# Altium PCB AudioPCB.PcbDoc (part 2 of 2)
Units mm, origin at the board's own origin, x right, y up, seen from the top; angles counter-clockwise.
Board outline 80 x 60 mm, 4 copper layers (Top Layer, GND, Power, Bottom Layer), stack 1.586 mm thick; 193 components, 130 nets, 539 pads, 148 vias.
Unrouted connection lines stored in the file: 1.
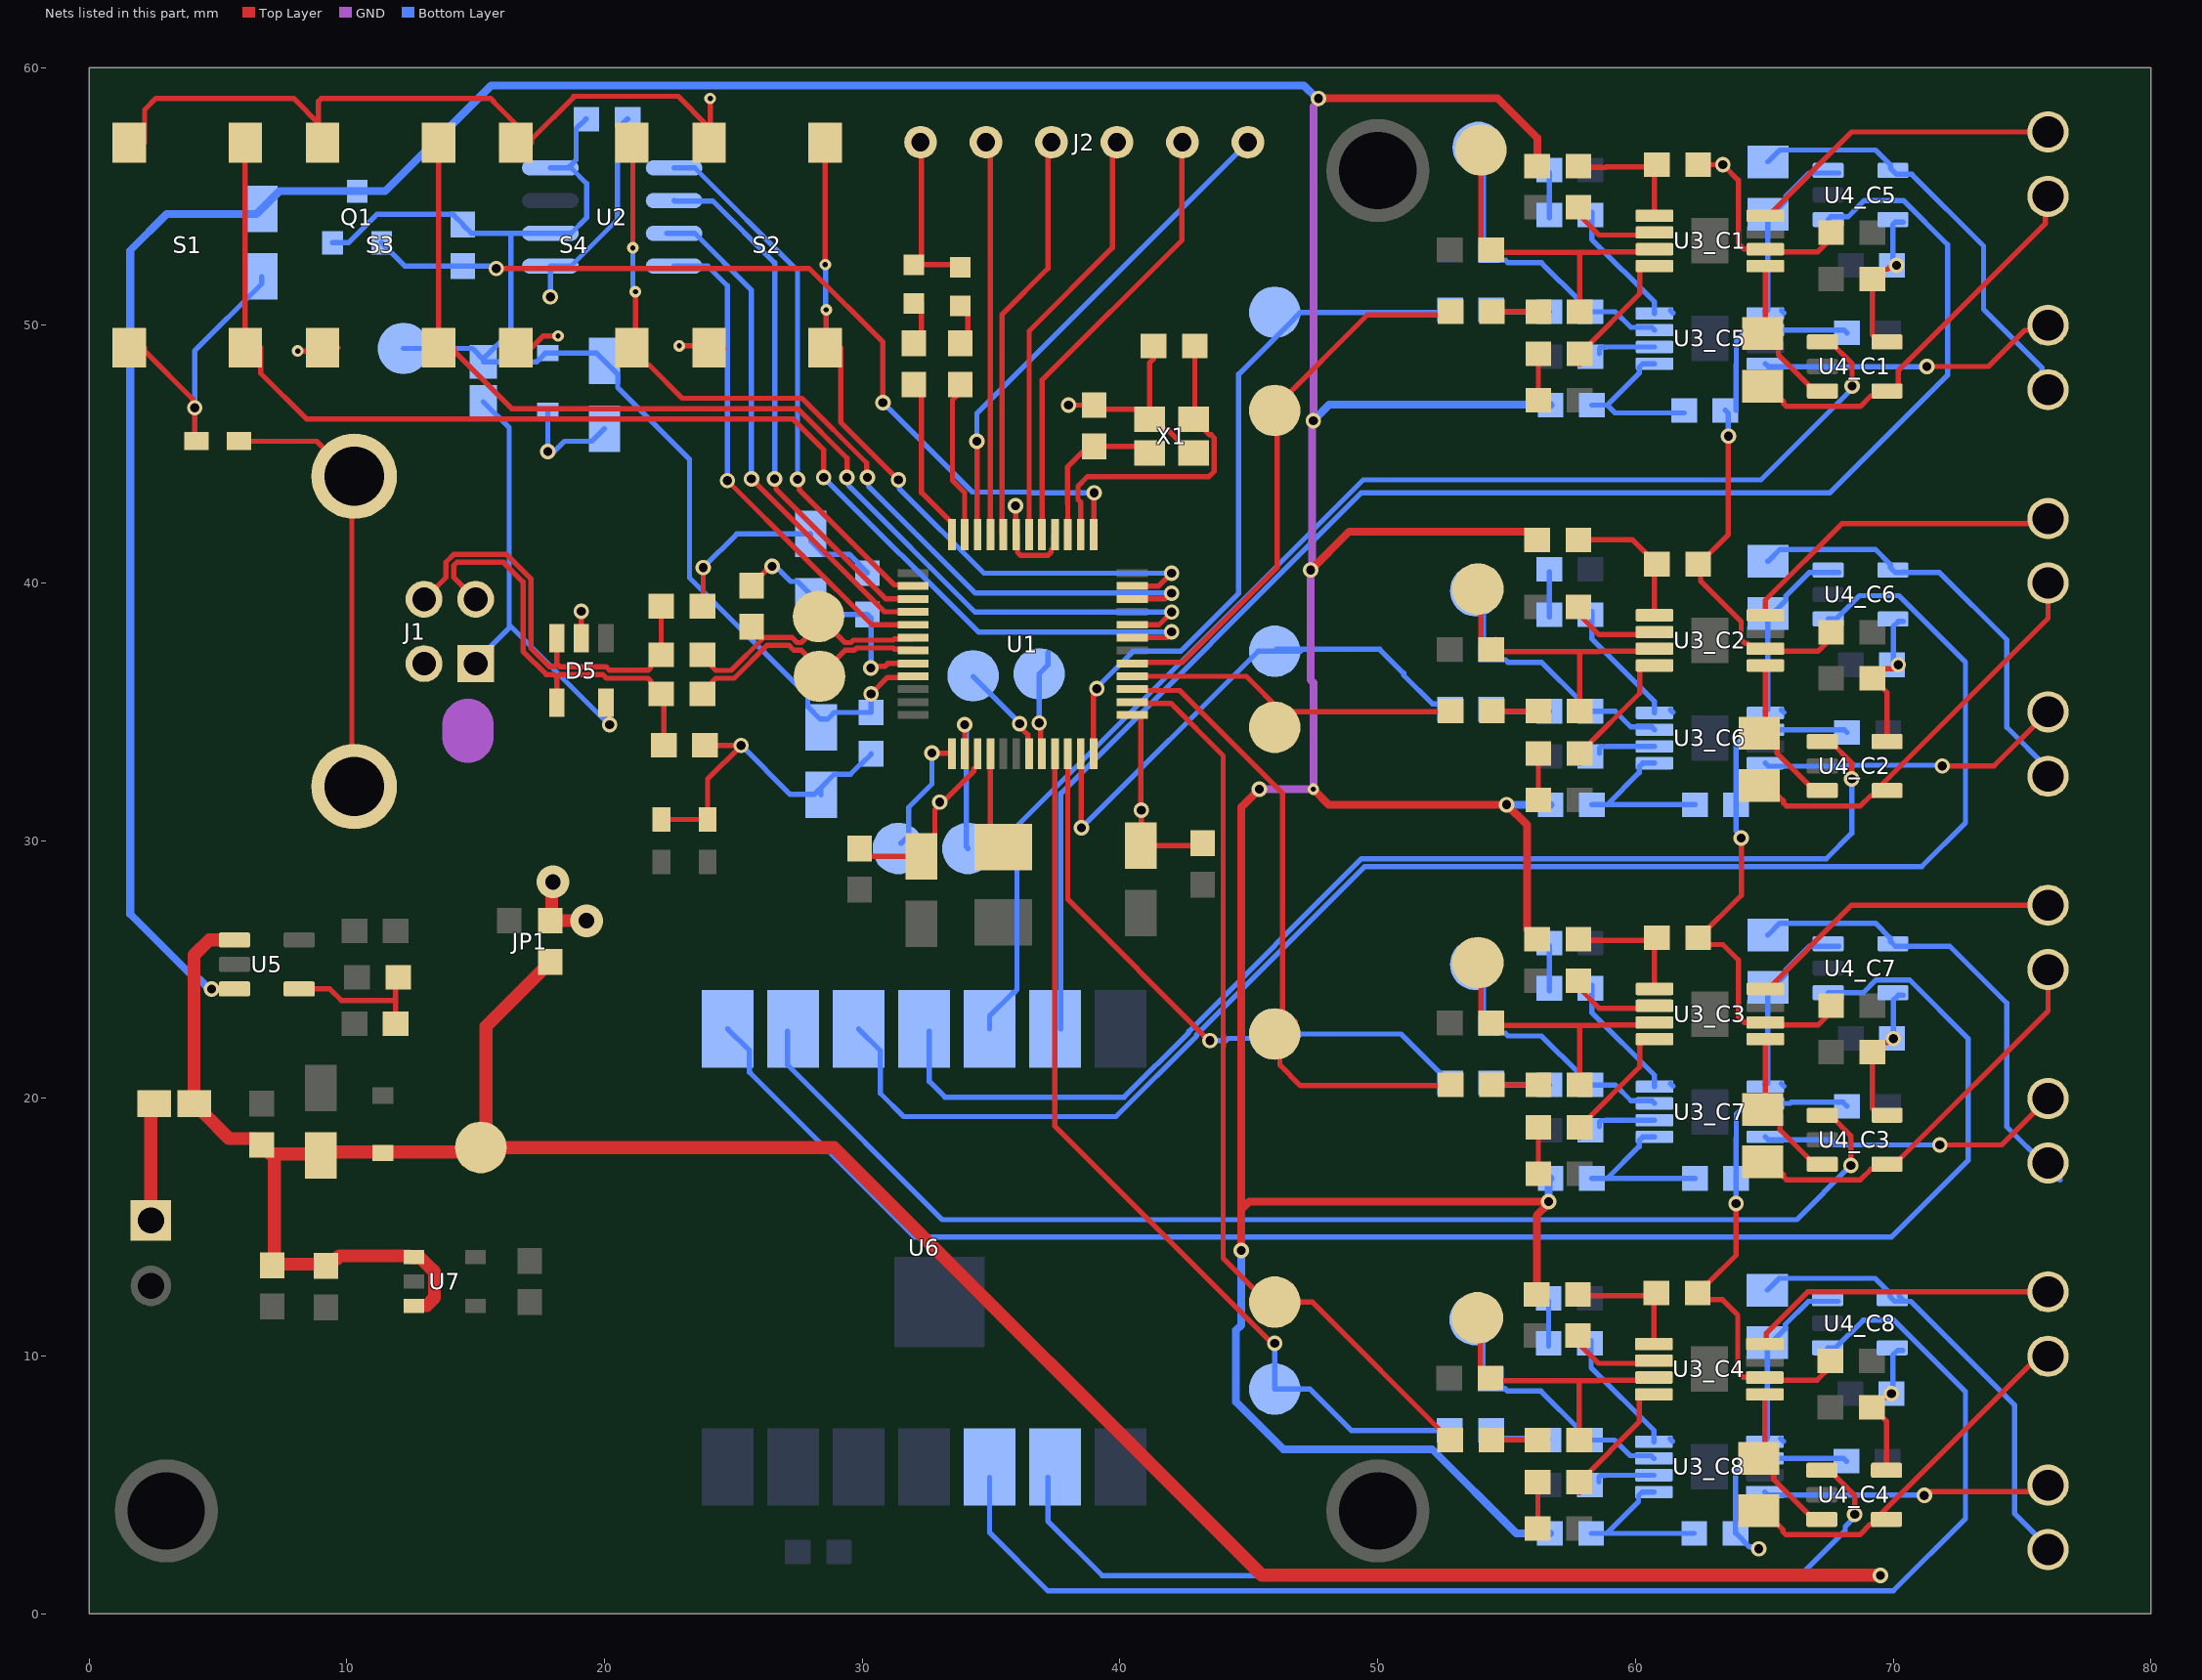
[diagram p4: the nets of this part, all layers, seen from the top]

## Via types
v1: diameter 0.6, hole 0.35, Top Layer to Bottom Layer, 97 vias
v2: diameter 0.55, hole 0.3, Top Layer to Bottom Layer, 40 vias
v3: diameter 0.45, hole 0.2, Top Layer to Bottom Layer, 9 vias
v4: diameter 1.27/1.27/1.27/1.27 (per signal layer), hole 0.6, Top Layer to Bottom Layer, 2 vias

## Nets (pads, with @x,y where several pads share a name; then routed paths per layer and width w, separated by ;. In a path a pad name is that pad's centre, name@x,y a point inside that pad or via, vN(x,y) a via of type N, cw(c..) or ccw(c..) an arc to the next point about the centre after c; other vN are vias at no path point) (continued)
AMP: C15.2 C16.2 C17.2 C18.2 C21_C1.2 C21_C2.2 C21_C3.2 C21_C4.2 C21_C5.2 C21_C6.2 C21_C7.2 C21_C8.2 JP1.2 R9_C1.2 R9_C2.2 R9_C3.2 R9_C4.2 R9_C5.2 R9_C6.2 R9_C7.2 R9_C8.2 U1.27 U1.37 U3_C1.6 U3_C2.6 U3_C3.6 U3_C4.6 U3_C5.6 U3_C6.6 U3_C7.6 U3_C8.6 | length 98
  Top Layer w0.203: C17.2@29.9,29.7 30.2,29.4 C18.2@32.3,29.4 32.515,29.4 32.813,29.698 32.813,31.206 33,31.393 v1(33,31.5) 33.076,31.576 33.206,31.576 34.326,32.696 34.326,32.783 34.473,32.93 U1.27@34.473,33.38 ; U1.37@40.473,34.88 40.752,34.88 40.8,34.832 v1@40.8,31.21 ; v1(40.822,31.188) 40.822,30.8 ; C15.2@41.029,30.039 C15.2@40.822,30.247 ; C15.2@41.033,30.036 40.822,30.036 C15.2@40.822,30.247 ; C15.2@41.033,30.043 C15.2@40.8,29.81 C16.2@43.522,29.81 ; R9_C4.2@62.364,12.2 63.364,12.2 63.964,11.6 63.964,9.404 64.188,9.18 64.908,9.18 65.014,9.075 67.044,9.075 67.539,9.57 C21_C4.2@67.564,9.57 ; R9_C3.2@62.386,25.974 63.386,25.974 63.986,25.374 63.986,23.179 64.21,22.955 64.931,22.955 65.036,22.849 67.066,22.849 67.561,23.344 C21_C3.2@67.586,23.344 ; R9_C2.2@62.386,40.474 62.408,40.474 62.525,40.357 62.525,40.07 64.097,38.498 64.097,37.81 64.251,37.656 64.333,37.656 64.54,37.449 U3_C2.6@65.035,37.449 ; R9_C4.2@62.407,12.456 62.407,12.523 62.363,12.567 62.626,12.83 62.805,12.83 63.9,13.924 v1(63.9,15.927) ; R9_C3.2@62.429,26.231 62.454,26.231 64.1,27.877 v1(64.1,30.1) ; R9_C2.2@62.429,40.731 62.454,40.731 63.6,41.877 v1(63.6,45.7) ; R9_C1.2@62.642,56.231 v1(63.385,56.231) 63.986,55.63 63.986,53.179 64.21,52.955 64.931,52.955 65.036,52.849 67.066,52.849 67.561,53.344 C21_C1.2@67.586,53.344 ; U3_C2.6@65.036,37.349 67.066,37.349 67.561,37.844 C21_C2.2@67.586,37.844 ; C15.2@40.822,30.247 40.822,30.8 ; C15.2@40.822,30.247 40.822,30.8
  Top Layer w0.508: v4(18,28.4) 17.95,28.35 17.95,26.95 JP1.2@17.9,26.9 v4(19.3,26.9)
  Bottom Layer w0.203: R9_C5.2@63.485,46.7 63.6,46.585 v1(63.6,45.7) v1@63.547,45.7 ; R9_C7.2@63.889,16.889 63.9,16.878 v1(63.9,15.927) ; R9_C7.2@63.9,16.9 63.9,18.472 63.905,18.477 63.905,19.399 64.209,19.703 64.93,19.703 U3_C7.6@65.035,19.808 65.985,19.808 66.029,19.853 68.047,19.853 C21_C7.2@68.2,19.7 ; R9_C5.2@63.9,46.7 63.9,48.472 63.905,48.477 63.905,49.399 64.209,49.703 64.93,49.703 U3_C5.6@65.035,49.808 68.092,49.808 C21_C5.2@68.2,49.7 ; v1(64.1,30.1) 64.1,30.18 63.9,30.38 63.9,33.751 64.319,34.17 64.897,34.17 U3_C6.6@65.035,34.308 68.092,34.308 C21_C6.2@68.2,34.2 ; v1(64.778,2.529) 64.702,2.605 64.424,2.605 63.903,3.126 R9_C8.2@63.878,3.126 63.878,4.698 63.883,4.703 63.883,5.625 64.187,5.929 64.908,5.929 U3_C8.6@65.013,6.034 68.07,6.034 C21_C8.2@68.178,5.926
AMP_EN: C10.2 Q1.3 R13_C1.2 R13_C2.2 R13_C3.2 R13_C4.2 R13_C5.2 R13_C6.2 R13_C7.2 R13_C8.2 U5.3 | length 208.5
  Top Layer w0.305: v1(4.757,24.25) U5.3@5.645,24.25 ; v1(44.7,14.1) 44.7,15.7 ; v1(45.4,32) 44.7,31.3 44.7,15.797 44.7,15.7 ; v1(47.389,40.5) 48.889,42 55.859,42 R13_C2.2@56.185,41.674 ; v3(47.5,32) 48.1,31.4 v1(55,31.4) 55.787,30.613 55.787,26.548 55.973,26.361 R13_C3.2@56.113,26.361 ; v1(47.7,58.8) 47.705,58.805 54.645,58.805 56.185,57.265 R13_C1.2@56.185,56.174 ; R13_C4.2@56.163,12.4 56.163,15.466 56.604,15.907 v1@56.604,15.976 ; v1(56.628,16) 45,16 44.797,15.797 44.7,15.7
  GND w0.305: v1(45.4,32) v3(47.5,32) 47.5,36.136 47.389,36.247 v1(47.389,40.5) 47.444,40.556 47.444,46.244 v1(47.5,46.3) 47.5,58.493 47.7,58.693 v1(47.7,58.8)
  Bottom Layer w0.305: v1(4.757,24.25) 4.666,24.25 4.284,24.632 4.121,24.632 1.6,27.154 1.6,52.9 3.01,54.31 6.5,54.31 7.39,55.2 Q1.3@10.4,55.2 11.494,55.2 15.599,59.304 47.134,59.304 47.638,58.8 v1(47.7,58.8) ; v1(44.7,14.1) 44.7,11.209 44.5,11.009 44.5,8.226 46.33,6.395 52.105,6.395 55.374,3.126 R13_C8.2@56.678,3.126 ; v1(47.5,46.3) 48.115,46.915 56.685,46.915 R13_C5.2@56.7,46.9 ; v1(55,31.4) R13_C6.2@56.7,31.4 ; v1(56.628,16) 56.628,16.828 R13_C7.2@56.7,16.9
AVDD5V: C1.2 C2.2 C12.2 C23_C1.2 C23_C2.2 C23_C3.2 C23_C4.2 C23_C5.2 C23_C6.2 C23_C7.2 C23_C8.2 C27.2 D2.1 FB2.2 JP1.1 TP16.1 U4_C1.5 U4_C2.5 U4_C3.5 U4_C4.5 U4_C5.5 U4_C6.5 U4_C7.5 U4_C8.5 U5.1 U7.1 U7.3 | length 125.9
  Top Layer w0.203: U4_C4.5@69.733,5.576 69.733,7.48 69.188,8.026 C23_C4.2@69.163,8.026 69.536,8.399 69.709,8.399 69.861,8.551 v1(69.928,8.551) ; U4_C3.5@69.755,19.35 69.445,19.35 69.185,19.61 C23_C3.2@69.185,21.8 69.558,22.173 69.782,22.173 69.933,22.325 v1(70,22.325) ; U4_C2.5@69.755,33.85 69.755,35.755 69.21,36.3 C23_C2.2@69.185,36.3 69.558,36.673 69.975,36.673 70.127,36.825 v1(70.193,36.825) ; U4_C1.5@69.755,49.35 69.445,49.35 69.185,49.61 C23_C1.2@69.185,51.8 69.558,52.173 69.782,52.173 69.886,52.278 70.08,52.278 v1(70.127,52.325)
  Top Layer w0.508: FB2.2@3.989,19.887 4.113,19.887 4.475,19.525 4.475,19.401 5.43,18.446 6.479,18.446 6.7,18.225 C2.2@6.7,18.2 6.7,18.175 7.031,17.844 7.056,17.844 C2.2@7.13,17.77 ; FB2.2@4.076,19.8 4.076,25.558 4.668,26.15 U5.1@5.645,26.15 ; C12.2@7.1,13.53 7.195,13.625 7.195,17.705 C2.2@7.13,17.77 ; C12.2@7.144,13.574 9.126,13.574 C27.2@9.2,13.5 9.2,13.525 9.421,13.746 9.571,13.746 9.719,13.894 U7.1@12.431,13.894 ; U7.1@12.454,13.871 12.496,13.829 12.847,13.829 13.145,13.531 13.147,13.531 13.4,13.278 13.4,12.269 13.102,11.971 12.621,11.971 U7.3@12.6,11.95 ; TP16.1@15.4,18.1 28.9,18.1 45.5,1.5 v1(69.5,1.5) ; JP1.1@17.9,25.3 15.4,22.8 15.4,18.3 TP16.1@15.2,18.1 15.029,17.929 11.4,17.929 9.139,17.929 C1.2@9,17.79 8.946,17.844 7.204,17.844 C2.2@7.13,17.77
  Bottom Layer w0.203: C23_C7.2@69.95,22.325 v1(70,22.325) 70,23.813 70.193,24.007 U4_C7.5@70.388,24.007 ; C23_C8.2@69.978,8.551 69.978,10.039 70.171,10.232 U4_C8.5@70.366,10.232 ; C23_C6.2@70,36.825 70,38.313 70.193,38.507 U4_C6.5@70.388,38.507 ; v1(70.127,52.325) C23_C5.2@69.95,52.325 69.981,52.356 69.981,53.91 70.078,54.007 U4_C5.5@70.388,54.007
CS: U1.14 U2.1 | length 20.9
  Top Layer w0.203: v1(27.49,44.016) 27.547,43.958 27.547,43.625 31.247,39.925 31.928,39.925 U1.14@31.973,39.88
  Bottom Layer w0.203: U2.1@22.7,56.105 23.498,56.105 27.49,52.113 v1(27.49,44.016)
CUR_SENSE1: U4_C1.1 U6.5 | length 50.2
  Top Layer w0.203: U4_C1.1@67.245,49.35 67.555,49.35 68.4,48.505 v1(68.4,47.643)
  Bottom Layer w0.203: U6.5@34.94,22.7 34.94,23.2 35.838,24.098 35.881,24.098 36,24.217 36,30.569 49.431,44 64.864,44 68.4,47.536 v1(68.4,47.643)
CUR_SENSE2: U4_C2.1 U6.4 | length 46.5
  Top Layer w0.203: U4_C2.1@67.245,33.85 67.555,33.85 68.386,33.019 v1(68.386,32.402)
  Bottom Layer w0.203: U6.4@32.6,22.6 32.6,20.656 33.206,20.05 40.158,20.05 42.667,22.559 42.667,22.604 49.368,29.305 67.405,29.305 68.386,30.286 v1(68.386,32.402)
CUR_SENSE3: U4_C3.1 U6.2 | length 48.5
  Top Layer w0.203: U4_C3.1@67.245,19.35 67.555,19.35 68.35,18.555 v1(68.35,17.4)
  Bottom Layer w0.203: U6.2@27.1,22.6 27.1,21.3 33.1,15.3 66.25,15.3 v1(68.35,17.4)
CUR_SENSE4: U4_C4.1 U6.9 | length 37.4
  Top Layer w0.203: U4_C4.1@67.223,5.576 67.533,5.576 68.5,4.608 v1(68.5,3.869)
  Bottom Layer w0.203: U6.9@37.2,5.3 37.2,3.6 39.308,1.492 66.392,1.492 68.135,3.235 68.135,3.397 68.5,3.762 v1(68.5,3.869)
CUR_SENSE5: U4_C5.1 U6.6 | length 61
  Bottom Layer w0.203: U6.6@37.7,22.7 37.7,31.838 49.362,43.5 67.541,43.5 72.1,48.059 72.1,53.129 70.386,54.842 68.88,54.842 68.247,54.209 67.577,54.209 U4_C5.1@67.471,54.103
CUR_SENSE6: U4_C6.1 U6.3 | length 63.1
  Bottom Layer w0.203: U6.3@29.86,22.7 30.7,21.86 30.7,20.2 31.6,19.3 39.838,19.3 42.971,22.433 42.971,22.477 49.494,29 71.1,29 72.8,30.7 72.8,36.929 70.221,39.508 68.685,39.508 67.781,38.603 U4_C6.1@67.471,38.603
CUR_SENSE7: U4_C7.1 U6.1 | length 64.5
  Bottom Layer w0.203: U6.1@24.78,22.7 25.624,21.856 25.624,21.019 25.743,20.9 32.014,14.629 69.929,14.629 72.9,17.6 72.9,22.329 70.627,24.602 69.335,24.602 68.837,24.103 U4_C7.1@67.471,24.103
CUR_SENSE8: U4_C8.1 U6.10 | length 54
  Bottom Layer w0.203: U6.10@34.94,5.3 34.94,3.162 37.202,0.9 70,0.9 72.8,3.7 72.8,8.632 70.032,11.4 68.83,11.4 67.759,10.329 U4_C8.1@67.449,10.329
DGND: C3.1 C4.1 C5.1 C6.1 C7.1 C8.1 C10.1 C13.1 C14.1 C19.1 C20.1 D1.2 D3.2 D4.2 D5.2 FB3.1 FB4.1 FB5.1 J1.4 J2.6 NT.1 S1.3 S1.4 S2.3 S2.4 S3.3 S3.4 S4.3 S4.4 U1.4 U1.7 U2.5 X1.2 X1.4 | length 100.3
  Top Layer w0.203: S1.4@2.161,49.128 2.161,49.001 4.024,47.138 4.024,46.876 v1(4.1,46.8) 4.1,45.575 FB5.1@4.175,45.5 ; S1.3@2.161,57.077 2.161,58.361 2.6,58.8 7.939,58.8 S3.3@8.988,57.751 ; v3(8.1,49) 8.934,49 S3.4@9.061,49.128 9.061,49.2 9.134,49.128 S3.4@9.661,49.128 ; S3.3@9.061,57.077 8.9,57.239 8.9,58.681 9.019,58.8 15.581,58.8 15.7,58.681 15.7,58.666 S4.3@17.161,57.204 ; S4.4@17.161,49.128 17.616,49.582 v3(18.2,49.582) ; S4.3@17.161,57.077 S4.3@17.161,57.204 ; D5.2@19.1,37.85 v1(19.1,38.9) ; FB4.1@22.2,30.825 FB3.1@24,30.825 24,32.394 25.3,33.694 v1(25.3,33.7) C4.1@23.9,33.7 ; v3(22.9,49.2) 23.75,49.2 23.85,49.1 S2.4@24.634,49.1 ; C3.1@23.8,39.1 23.829,39.129 v1(23.829,40.6) ; S2.3@24.061,57.077 24.1,57.116 S2.3@24.1,57.751 ; v3(24.1,58.8) S2.3@24.1,57.751 ; J2.6@32.26,57.1 32.26,56.56 32.3,56.6 32.3,52.35 34,52.35 D3.2@34.1,52.25 ; v1(35.944,43) 35.959,42.986 35.959,41.894 U1.7@35.973,41.88 ; U1.7@36.021,41.832 36.021,41.196 36.14,41.077 37.207,41.077 37.326,41.196 37.326,41.283 37.425,41.382 37.425,41.832 U1.4@37.473,41.88 ; v1(38,46.9) C8.1@39,46.9 39.156,46.744 40.756,46.744 X1.2@41.15,46.35 ; 41.3,48.7 41.15,48.55 X1.2@41.15,46.35 ; X1.4@42.85,45.05 42.748,45.05 41.842,45.956 41.544,45.956 X1.2@41.15,46.35 ; S4.3@17.161,57.204 18.8,58.843 18.8,58.881 22.858,58.881 23.988,57.751 S2.3@24.1,57.751
  GND w2: NT.1@14.7,34.031 14.7,34.5
  Bottom Layer w0.203: v1(4.1,46.8) 4.1,49.005 6.7,51.605 C10.1@6.7,51.89 ; D1.2@17.8,46.685 v1(17.8,45.1) 18.052,45.1 18.452,45.5 19.51,45.5 C5.1@20,45.99 ; v1(17.9,51.1) U2.5@17.9,52.295 18.7,52.295 20.502,54.097 20.502,57.627 20.875,58 C6.1@20.9,58 ; v1(23.829,40.6) 25.129,41.9 27.99,41.9 C19.1@28,41.91 28,41.625 28.513,41.112 29.493,41.112 30.2,40.405 C20.1@30.2,40.38 ; v1(25.3,33.7) 27.2,31.8 28.135,31.8 C13.1@28.4,32.065 ; C13.1@28.4,31.78 C13.1@28.4,32.065 ; C14.1@30.342,33.378 30.342,33.353 29.968,32.98 29.943,32.98 29.542,32.578 28.913,32.578 C13.1@28.4,32.065
DR: U1.16 U2.3 | length 19.6
  Top Layer w0.203: v1(25.7,44.037) 30.857,38.88 U1.16@31.657,38.88
  Bottom Layer w0.203: U2.3@22.408,53.565 23.5,53.565 25.7,51.365 v1(25.7,44.037)
DVDD5V: C5.2 C6.2 C13.2 C14.2 D1.1 FB1.2 Q1.2 R3.2 TP15.1 U1.21 U2.6 U2.8 | length 51.8
  Top Layer w0.203: v1(30.342,35.697) 30.979,36.335 31.928,36.335 U1.21@31.973,36.38
  Bottom Layer w0.203: Q1.2@9.45,53.2 10.069,53.2 11.169,54.3 14.008,54.3 14.009,54.298 14.127,54.298 14.5,53.925 R3.2@14.5,53.9 14.835,53.565 16.367,53.565 ; TP15.1@12.2,49.1 14.872,49.1 FB1.2@15.3,48.672 ; U2.8@17.9,56.105 U2.8@18.593,56.105 ; C6.2@19.3,58 19.275,58 18.902,57.627 18.902,56.414 18.646,56.159 U2.8@18.593,56.105 ; v1(30.342,35.697) C14.2@30.342,34.978 28.913,34.978 28.657,34.721 28.364,34.721 27.887,35.198 27.887,35.613 23.3,40.2 23.3,44.8 20.513,47.587 20.513,48.097 19.695,48.915 D1.1@17.8,48.915 17.7,48.915 17.361,48.576 FB1.2@15.3,48.576 FB1.2@15.3,48.672 ; FB1.2@15.3,48.672 15.3,48.7 16.367,49.768 16.367,53.565 ; 16.367,53.565 U2.6@17.9,53.565 18.7,53.565 19.305,54.17 19.305,55.5 18.7,56.105 U2.8@18.593,56.105
DW: U1.17 U2.4 | length 19.5
  Top Layer w0.203: v1(24.768,43.972) 27.692,41.048 27.704,41.048 30.372,38.38 U1.17@31.973,38.38
  Bottom Layer w0.203: U2.4@22.7,52.295 24.005,52.295 24.768,51.532 v1(24.768,43.972)
GPIO1: J2.1 U1.10 | length 19.6
  Top Layer w0.203: v1(34.444,45.5) 34.459,45.486 34.459,41.894 U1.10@34.473,41.88
  Bottom Layer w0.203: v1(34.444,45.5) 34.444,46.584 J2.1@44.96,57.1
LEDO: R5.2 U1.11 | length 6.3
  Top Layer w0.203: U1.11@33.973,41.88 33.97,41.883 33.97,43.506 33.5,43.976 33.5,47.1 33.702,47.302 33.727,47.302 34.1,47.675 R5.2@34.1,47.7
LEDR: R4.2 U1.12 | length 6.3
  Top Layer w0.203: R4.2@32.3,47.7 32.3,43.503 33.473,42.33 U1.12@33.473,41.88
LINE_OUT1: C22_C1.1 TP1.1 U1.41 | length 22.2
  Top Layer w0.203: U1.41@40.473,36.88 40.518,36.925 42.425,36.925 46.1,40.6 46.1,46.9 49.6,50.4 C22_C1.1@52.793,50.4 ; TP1.1@45.6,46.841 TP1.1@46.1,46.841 ; C22_C1.1@52.799,50.4 C22_C1.1@52.83,50.431
LINE_OUT2: C22_C2.1 TP2.1 U1.40 | length 14.4
  Top Layer w0.203: U1.40@40.473,36.38 44.9,36.38 46.28,35 47,35 ; C22_C2.1@52.798,35 48.5,35 ; C22_C2.1@52.799,34.9 C22_C2.1@52.83,34.931 ; 47,35 48.5,35 ; 47,35 48.5,35
LINE_OUT3: C22_C3.1 TP3.1 U1.39 | length 25.7
  Top Layer w0.203: U1.39@40.473,35.88 40.521,35.832 42.316,35.832 46.3,31.848 TP3.1@46.3,22.339 ; TP3.1@46,22.5 46.2,22.3 46.2,21.3 47,20.5 C22_C3.1@52.798,20.5 ; TP3.1@46.804,22.5 TP3.1@46.804,22.996
LINE_OUT4: C22_C4.1 TP4.1 U1.38 | length 35.6
  Top Layer w0.203: U1.38@40.473,35.38 40.521,35.332 41.968,35.332 44,33.3 44,22.477 44.014,22.463 44.014,22.025 44,22.011 44,13.8 45.419,12.381 46.697,12.381 46.978,12.1 47.463,12.1 C22_C4.1@52.807,6.756
LINE_OUT5: C22_C5.1 TP5.1 U1.36 | length 27.4
  Top Layer w0.203: U1.36@38.973,33.38 38.973,35.693 39.1,35.82 v1(39.1,35.9)
  Bottom Layer w0.203: v1(39.1,35.9) 39.1,35.945 40.509,37.353 42.353,37.353 44.6,39.6 44.6,48.1 46.5,50 47,50.5 52.7,50.5 C22_C5.1@52.8,50.6
LINE_OUT6: C22_C6.1 TP6.1 U1.35 | length 22.1
  Top Layer w0.203: U1.35@38.473,33.38 38.487,33.366 38.487,30.514 v1(38.502,30.5)
  Bottom Layer w0.203: v1(38.502,30.5) 45.355,37.353 46.075,37.353 47,37.353 ; TP6.1@46,37.353 46.075,37.429 47,37.429 50.071,37.429 51,36.5 51,36.427 52.114,35.313 52.587,35.313 C22_C6.1@52.8,35.1
LINE_OUT7: C22_C7.1 TP7.1 U1.34 | length 23.7
  Top Layer w0.203: U1.34@37.973,33.38 37.973,27.727 43.456,22.244 v1(43.486,22.244)
  Bottom Layer w0.203: v1(43.486,22.244) 44.102,22.244 44.192,22.334 46.682,22.334 46.758,22.258 47,22.5 50.9,22.5 C22_C7.1@52.8,20.6
LINE_OUT8: C22_C8.1 TP8.1 U1.33 | length 35.7
  Top Layer w0.203: U1.33@37.473,33.38 37.473,18.925 45.898,10.5 v1(46,10.5)
  Bottom Layer w0.203: v1(46,10.5) TP8.1@46,8.726 47.37,8.726 48.971,7.124 C22_C8.1@52.793,7.124
MCLK: J2.4 U1.8 | length 16.4
  Top Layer w0.203: U1.8@35.473,41.88 35.425,41.928 35.425,42.489 35.416,42.497 35.416,50.416 37.2,52.2 J2.4@37.2,57.512
MNT: J2.5 U1.9 | length 15.2
  Top Layer w0.203: U1.9@34.973,41.88 J2.5@34.973,57.126
MUTEP: S2.1 S2.2 U1.47 | length 28.1
  Top Layer w0.203: S2.2@28.561,49.128 28.6,49.166 v3(28.6,50.6) ; v3(28.561,52.35) S2.1@28.561,57.077 ; S2.2@29.161,49.128 29.161,46.239 v1(31.4,44) ; U1.47@40.473,39.88 41.493,39.88 41.993,40.38 v1@42.011,40.38
  Bottom Layer w0.203: v3(28.561,52.35) 28.581,52.331 28.581,50.619 v3(28.6,50.6) ; v1(31.4,44) 31.439,43.961 31.439,43.661 34.72,40.38 v1@42.011,40.38
  other v1: 42,40.38
MUTER: S4.1 S4.2 U1.46 | length 35.2
  Top Layer w0.203: v3@21.061,51.3 v3(21.2,51.3) 21.2,49.266 S4.2@21.061,49.128 21.061,49.001 21.607,48.454 21.734,48.454 23.021,47.167 27.658,47.167 30.17,44.655 30.17,44.13 v1(30.2,44.1) ; S4.1@21.061,57.077 21.1,57.039 v3(21.1,53) ; U1.46@40.473,39.38 41.734,39.38 41.954,39.6 v1@42.061,39.6
  Bottom Layer w0.203: v3@21.1,51.467 v3(21.1,53) ; v1(30.2,44.1) 30.239,44.061 30.239,43.761 34.394,39.606 v1@42.055,39.606
  other v1: 42,39.6
NetC9_1: C9.1 U1.28 | length 4
  Top Layer w0.203: C9.1@34.973,29.427 U1.28@34.973,33.38
NetC19_2: C19.2 C20.2 R8.1 U1.20 | length 9.7
  Top Layer w0.203: R8.1@25.7,39.9 25.7,39.925 26.42,40.645 v1(26.5,40.645) ; v1(30.335,36.707) 30.392,36.763 30.875,36.763 30.992,36.88 U1.20@31.973,36.88
  Bottom Layer w0.203: v1@26.447,40.843 27.23,40.06 27.487,40.06 28,39.546 C19.2@28,39.29 ; C19.2@28,39.293 28.513,38.78 C20.2@30.2,38.78 30.335,38.645 v1(30.335,36.707)
NetC22_C1_2: C22_C1.2 R10_C1.1 | length 1.8
  Top Layer w0.203: C22_C1.2@54.429,50.531 R10_C1.1@56.229,50.531
NetC22_C2_2: C22_C2.2 R10_C2.1 | length 1.8
  Top Layer w0.203: C22_C2.2@54.429,35.031 R10_C2.1@56.229,35.031
NetC22_C3_2: C22_C3.2 R10_C3.1 | length 1.8
  Top Layer w0.203: C22_C3.2@54.429,20.531 R10_C3.1@56.229,20.531
NetC22_C4_2: C22_C4.2 R10_C4.1 | length 1.8
  Top Layer w0.203: C22_C4.2@54.407,6.756 R10_C4.1@56.207,6.756
NetC22_C5_2: C22_C5.2 R10_C5.1 | length 2.3
  Bottom Layer w0.203: C22_C5.2@54.4,50.6 54.475,50.525 R10_C5.1@56.65,50.525
NetC22_C6_2: C22_C6.2 R10_C6.1 | length 2.2
  Bottom Layer w0.203: C22_C6.2@54.429,35.031 54.435,35.025 R10_C6.1@56.65,35.025
NetC22_C7_2: C22_C7.2 R10_C7.1 | length 2.3
  Bottom Layer w0.203: C22_C7.2@54.375,20.625 54.475,20.525 R10_C7.1@56.65,20.525
NetC22_C8_2: C22_C8.2 R10_C8.1 | length 2.3
  Bottom Layer w0.203: C22_C8.2@54.378,6.826 56.553,6.826 R10_C8.1@56.628,6.751
NetC24_C1_2: C24_C1.2 R10_C1.2 TP17_C1.1 U3_C1.3 | length 13.9
  Top Layer w0.203: TP17_C1.1@54.218,57.265 53.995,57.042 53.995,53.204 54.218,52.981 54.368,52.831 54.393,52.831 57.855,52.831 ; C24_C1.2@54.268,53.031 C24_C1.2@54.293,53.031 ; C24_C1.2@54.568,53.031 54.431,53.168 C24_C1.2@54.568,53.306 ; R10_C1.2@57.83,50.431 57.83,52.806 57.855,52.831 ; U3_C1.3@60.736,52.849 58.586,52.849 58.567,52.831 57.855,52.831
NetC24_C2_2: C24_C2.2 R10_C2.2 TP17_C2.1 U3_C2.3 | length 11.7
  Top Layer w0.203: TP17_C2.1@53.886,39.667 53.995,39.558 53.995,37.704 54.368,37.331 54.393,37.331 57.855,37.331 ; C24_C2.2@54.268,37.531 C24_C2.2@54.293,37.531 ; C24_C2.2@54.568,37.531 54.431,37.668 C24_C2.2@54.568,37.806 ; R10_C2.2@57.83,34.931 57.83,37.306 57.855,37.331 ; U3_C2.3@60.736,37.349 58.586,37.349 58.567,37.331 57.855,37.331
NetC24_C3_2: C24_C3.2 R10_C3.2 TP17_C3.1 U3_C3.3 | length 11.7
  Top Layer w0.203: TP17_C3.1@53.886,25.167 53.995,25.058 53.995,23.204 54.368,22.831 54.393,22.831 57.855,22.831 ; C24_C3.2@54.268,23.031 C24_C3.2@54.293,23.031 ; C24_C3.2@54.568,23.031 54.431,23.168 C24_C3.2@54.568,23.306 ; R10_C3.2@57.83,20.431 57.83,22.806 57.855,22.831 ; U3_C3.3@60.736,22.849 58.586,22.849 58.567,22.831 57.855,22.831
NetC24_C4_2: C24_C4.2 R10_C4.2 TP17_C4.1 U3_C4.3 | length 11.7
  Top Layer w0.203: TP17_C4.1@53.864,11.393 53.973,11.283 53.973,9.43 54.346,9.056 54.371,9.056 57.833,9.056 ; C24_C4.2@54.246,9.256 C24_C4.2@54.271,9.256 ; C24_C4.2@54.546,9.256 54.409,9.394 C24_C4.2@54.546,9.531 ; R10_C4.2@57.808,6.656 57.808,9.031 57.833,9.056 ; U3_C4.3@60.714,9.075 58.564,9.075 58.545,9.056 57.833,9.056
NetC24_C5_2: C24_C5.2 R10_C5.2 TP17_C5.1 U3_C5.3 | length 11.1
  Bottom Layer w0.203: TP17_C5.1@54.1,56.4 54.1,53.2 C24_C5.2@54.4,52.9 ; C24_C5.2@54.527,52.798 54.798,52.527 54.948,52.527 55.05,52.425 56.35,52.425 57.852,50.923 57.852,50.898 58.225,50.525 R10_C5.2@58.25,50.525 59.21,50.525 59.822,49.913 60.63,49.913 U3_C5.3@60.735,49.808
NetC24_C6_2: C24_C6.2 R10_C6.2 TP17_C6.1 U3_C6.3 | length 9.7
  Bottom Layer w0.203: TP17_C6.1@54.1,39.5 54.1,37.7 C24_C6.2@54.4,37.4 ; C24_C6.2@54.527,37.298 54.798,37.027 54.948,37.027 55.05,36.925 56.35,36.925 57.852,35.423 57.852,35.398 58.225,35.025 R10_C6.2@58.25,35.025 59.21,35.025 59.822,34.413 60.63,34.413 U3_C6.3@60.735,34.308
NetC24_C7_2: C24_C7.2 R10_C7.2 TP17_C7.1 U3_C7.3 | length 9.7
  Bottom Layer w0.203: TP17_C7.1@54.1,25 54.1,23.2 C24_C7.2@54.4,22.9 ; C24_C7.2@54.527,22.798 54.798,22.527 54.948,22.527 55.05,22.425 56.35,22.425 57.852,20.923 57.852,20.898 58.225,20.525 R10_C7.2@58.25,20.525 59.21,20.525 59.822,19.913 60.63,19.913 U3_C7.3@60.735,19.808
NetC24_C8_2: C24_C8.2 R10_C8.2 TP17_C8.1 U3_C8.3 | length 9.7
  Bottom Layer w0.203: TP17_C8.1@54.078,11.226 54.078,9.426 C24_C8.2@54.378,9.126 ; C24_C8.2@54.505,9.023 54.776,8.752 54.926,8.752 55.028,8.651 56.328,8.651 57.829,7.149 57.829,7.124 58.203,6.751 R10_C8.2@58.228,6.751 59.188,6.751 59.799,6.139 60.608,6.139 U3_C8.3@60.713,6.034
NetC25_C1_2: C25_C1.2 U3_C1.2 | length 3.3
  Top Layer w0.203: C25_C1.2@57.786,54.274 57.811,54.274 58.586,53.499 U3_C1.2@60.736,53.499
NetC25_C2_2: C25_C2.2 U3_C2.2 | length 3.3
  Top Layer w0.203: C25_C2.2@57.786,38.774 57.811,38.774 58.586,37.999 U3_C2.2@60.736,37.999
NetC25_C3_2: C25_C3.2 U3_C3.2 | length 3.3
  Top Layer w0.203: C25_C3.2@57.786,24.274 57.811,24.274 58.586,23.499 U3_C3.2@60.736,23.499
NetC25_C4_2: C25_C4.2 U3_C4.2 | length 3.3
  Top Layer w0.203: C25_C4.2@57.764,10.5 57.789,10.5 58.564,9.725 U3_C4.2@60.714,9.725
NetC25_C5_2: C25_C5.2 U3_C5.2 | length 2.4
  Bottom Layer w0.203: C25_C5.2@58.6,48.9 58.6,49.1 58.648,49.148 58.848,49.148 58.858,49.158 U3_C5.2@60.735,49.158
NetC25_C6_2: C25_C6.2 U3_C6.2 | length 2.4
  Bottom Layer w0.203: C25_C6.2@58.6,33.4 58.6,33.6 58.648,33.648 58.848,33.648 58.858,33.658 U3_C6.2@60.735,33.658
NetC25_C7_2: C25_C7.2 U3_C7.2 | length 2.4
  Bottom Layer w0.203: C25_C7.2@58.6,18.9 58.6,19.1 58.648,19.148 58.848,19.148 58.858,19.158 U3_C7.2@60.735,19.158
NetC25_C8_2: C25_C8.2 U3_C8.2 | length 2.4
  Bottom Layer w0.203: C25_C8.2@58.578,5.126 58.578,5.326 58.626,5.374 58.826,5.374 58.836,5.384 U3_C8.2@60.713,5.384
NetC26_C1_2: C26_C1.2 R12_C1.1 | length 1.8
  Top Layer w0.203: C26_C1.2@56.229,47.088 R12_C1.1@56.229,48.888
NetC26_C2_2: C26_C2.2 R12_C2.1 | length 1.8
  Top Layer w0.203: C26_C2.2@56.229,31.588 R12_C2.1@56.229,33.388
NetC26_C3_2: C26_C3.2 R12_C3.1 | length 1.8
  Top Layer w0.203: C26_C3.2@56.229,17.088 R12_C3.1@56.229,18.888
NetC26_C4_2: C26_C4.2 R12_C4.1 | length 1.8
  Top Layer w0.203: C26_C4.2@56.207,3.314 R12_C4.1@56.207,5.114
NetC26_C5_2: C26_C5.2 R12_C5.1 | length 1.8
  Bottom Layer w0.203: R12_C5.1@56.65,54.171 C26_C5.2@56.65,55.921
NetC26_C6_2: C26_C6.2 R12_C6.1 | length 1.8
  Bottom Layer w0.203: R12_C6.1@56.65,38.671 C26_C6.2@56.65,40.421
NetC26_C7_2: C26_C7.2 R12_C7.1 | length 1.8
  Bottom Layer w0.203: R12_C7.1@56.65,24.171 C26_C7.2@56.65,25.921
NetC26_C8_2: C26_C8.2 R12_C8.1 | length 1.8
  Bottom Layer w0.203: R12_C8.1@56.628,10.397 C26_C8.2@56.628,12.147
NetD3_1: D3.1 R5.1 | length 1.5
  Top Layer w0.203: R5.1@34.1,49.3 D3.1@34.1,50.75
NetD4_1: D4.1 R4.1 | length 1.5
  Top Layer w0.203: R4.1@32.3,49.3 D4.1@32.3,50.85
NetD5_5: D5.5 FB1.1 J1.1 | length 17.6
  Top Layer w0.203: D5.5@20.05,35.35 20.143,35.257 20.143,34.557 v1(20.2,34.5)
  Bottom Layer w0.203: J1.1@14.91,36.87 16.3,38.26 16.3,38.379 ; FB1.1@15.3,47.024 16.3,46.024 16.3,38.379 ; v1(20.2,34.5) 20.179,34.5 16.3,38.379
NetFB2_1: FB2.1 J3.1 | length 4.6
  Top Layer w0.203: FB2.1@2.4,19.676 FB2.1@2.524,19.8
  Top Layer w0.508: J3.1@2.4,15.27 FB2.1@2.4,19.676
NetFB5_2: FB5.2 J1.SH1 J1.SH2 | length 17
  Top Layer w0.203: FB5.2@5.825,45.5 8.84,45.5 10.2,44.14 J1.SH2@10.2,32.1
NetQ1_1: Q1.1 R3.1 U1.1 | length 34.7
  Top Layer w0.203: v1(15.8,52.2) 27.942,52.2 30.8,49.342 v1(30.8,47) ; U1.1@38.973,41.88 38.986,41.893 38.986,43.486 v1(39,43.5)
  Bottom Layer w0.203: Q1.1@11.35,53.2 12.25,52.3 R3.1@14.5,52.3 15.62,52.3 15.72,52.2 v1(15.8,52.2) ; v1(30.8,47) 34.271,43.529 36.53,43.529 36.558,43.5 v1(39,43.5)
NetR6_1: R6.1 R7.2 U5.4 | length 5.7
  Top Layer w0.203: U5.4@8.155,24.25 9.344,24.25 9.794,23.8 11.9,23.8 ; R7.2@11.9,22.9 11.9,23.8 ; R6.1@11.9,24.7 11.9,23.8
NetR9_C1_1: R9_C1.1 R13_C1.1 U3_C1.1 | length 5
  Top Layer w0.203: R13_C1.1@57.842,56.131 58.846,56.131 58.865,56.149 60.736,56.149 60.736,56.131 60.83,56.131 60.736,56.037 U3_C1.1@60.736,54.149
NetR9_C2_1: R9_C2.1 R13_C2.1 U3_C2.1 | length 5.5
  Top Layer w0.203: R13_C2.1@57.785,41.674 58.811,41.674 59.885,41.674 R9_C2.1@60.829,40.731 ; U3_C2.1@60.736,38.649 60.736,40.537 60.83,40.631 R9_C2.1@60.736,40.631
NetR9_C3_1: R9_C3.1 R13_C3.1 U3_C3.1 | length 5.1
  Top Layer w0.203: R13_C3.1@57.786,26.074 57.842,26.131 60.83,26.131 60.736,26.037 U3_C3.1@60.736,24.149
NetR9_C4_1: R9_C4.1 R13_C4.1 U3_C4.1 | length 5.1
  Top Layer w0.203: R13_C4.1@57.764,12.3 57.82,12.356 60.808,12.356 60.714,12.262 U3_C4.1@60.714,10.375
NetR9_C5_1: R9_C5.1 R13_C5.1 U3_C5.1 | length 6.4
  Bottom Layer w0.203: R13_C5.1@58.3,46.9 58.9,46.9 ; U3_C5.1@60.735,48.508 60.278,48.508 60.139,48.37 60.139,48.139 58.9,46.9 ; R9_C5.1@61.896,46.6 59.2,46.6 58.9,46.9
NetR9_C6_1: R9_C6.1 R13_C6.1 U3_C6.1 | length 6.6
  Bottom Layer w0.203: R13_C6.1@58.3,31.4 58.9,31.4 ; U3_C6.1@60.735,33.008 60.278,33.008 60.139,32.87 60.139,32.639 58.9,31.4 ; R9_C6.1@62.3,31.4 58.9,31.4
NetR9_C7_1: R9_C7.1 R13_C7.1 U3_C7.1 | length 6.6
  Bottom Layer w0.203: R13_C7.1@58.3,16.9 58.9,16.9 ; U3_C7.1@60.735,18.508 60.278,18.508 60.139,18.37 60.139,18.139 58.9,16.9 ; R9_C7.1@62.3,16.9 58.9,16.9
NetR9_C8_1: R9_C8.1 R13_C8.1 U3_C8.1 | length 6.6
  Bottom Layer w0.203: R13_C8.1@58.278,3.126 58.878,3.126 ; U3_C8.1@60.713,4.734 60.256,4.734 60.117,4.595 60.117,4.365 58.878,3.126 ; R9_C8.1@62.278,3.126 58.878,3.126
NetR11_C1_2: R11_C1.2 U3_C1.5 U4_C1.3 | length 6
  Top Layer w0.203: U3_C1.5@65.036,52.299 65.036,49.616 65.056,49.616 65.534,49.138 65.534,48.851 66.935,47.45 U4_C1.3@67.246,47.45
NetR11_C2_2: R11_C2.2 U3_C2.5 U4_C2.3 | length 5.9
  Top Layer w0.203: U3_C2.5@65.036,36.799 65.036,34.116 65.487,33.665 65.487,33.398 66.935,31.95 U4_C2.3@67.246,31.95
NetR11_C3_2: R11_C3.2 U3_C3.5 U4_C3.3 | length 5.9
  Top Layer w0.203: U3_C3.5@65.036,22.299 65.036,19.616 65.602,19.05 65.602,18.783 66.935,17.45 U4_C3.3@67.246,17.45
NetR11_C4_2: R11_C4.2 U3_C4.5 U4_C4.3 | length 5.9
  Top Layer w0.203: R11_C4.2@65.014,5.842 U3_C4.5@65.013,8.525 ; R11_C4.2@65.024,5.842 65.362,5.503 65.362,5.216 66.709,3.869 67.03,3.869 U4_C4.3@67.223,3.676
NetR11_C5_2: R11_C5.2 U3_C5.5 U4_C5.3 | length 7.5
  Bottom Layer w0.203: U3_C5.5@65.029,50.534 65.071,50.534 65.134,50.597 R11_C5.2@65.134,54.309 65.299,54.309 65.832,54.842 65.832,55.007 66.731,55.907 U4_C5.3@67.878,55.907 ; U3_C5.5@65.651,50.579 U3_C5.5@65.755,50.475
NetR11_C6_2: R11_C6.2 U3_C6.5 U4_C6.3 | length 7.5
  Bottom Layer w0.203: U3_C6.5@65.029,35.034 65.071,35.034 65.134,35.097 R11_C6.2@65.134,38.809 65.299,38.809 65.832,39.342 65.832,39.508 66.731,40.407 U4_C6.3@67.878,40.407 ; U3_C6.5@65.651,35.079 U3_C6.5@65.755,34.975
NetR11_C7_2: R11_C7.2 U3_C7.5 U4_C7.3 | length 7.5
  Bottom Layer w0.203: U3_C7.5@65.029,20.534 65.071,20.534 65.134,20.597 R11_C7.2@65.134,24.309 65.299,24.309 65.832,24.842 65.832,25.008 66.731,25.907 U4_C7.3@67.878,25.907 ; U3_C7.5@65.651,20.579 U3_C7.5@65.755,20.475
NetR11_C8_2: R11_C8.2 U3_C8.5 U4_C8.3 | length 7.5
  Bottom Layer w0.203: U3_C8.5@65.007,6.759 65.049,6.759 65.112,6.822 R11_C8.2@65.112,10.535 65.277,10.535 65.81,11.068 65.81,11.233 66.709,12.132 U4_C8.3@67.856,12.132 ; U3_C8.5@65.629,6.805 U3_C8.5@65.733,6.701
NetR12_C1_2: R12_C1.2 U3_C1.4 | length 4.7
  Top Layer w0.203: R12_C1.2@57.83,48.488 R12_C1.2@57.855,48.488 ; R12_C1.2@57.911,48.974 60.162,51.226 60.162,52.061 60.301,52.199 U3_C1.4@60.736,52.199
NetR12_C2_2: R12_C2.2 U3_C2.4 | length 4.7
  Top Layer w0.203: R12_C2.2@57.83,32.988 R12_C2.2@57.855,32.988 ; R12_C2.2@57.911,33.474 60.162,35.726 60.162,36.561 60.301,36.699 U3_C2.4@60.736,36.699
NetR12_C3_2: R12_C3.2 U3_C3.4 | length 4.7
  Top Layer w0.203: R12_C3.2@57.83,18.488 R12_C3.2@57.855,18.488 ; R12_C3.2@57.911,18.974 60.162,21.226 60.162,22.061 60.301,22.199 U3_C3.4@60.736,22.199
NetR12_C4_2: R12_C4.2 U3_C4.4 | length 4.7
  Top Layer w0.203: R12_C4.2@57.808,4.714 R12_C4.2@57.833,4.714 ; R12_C4.2@57.889,5.2 60.14,7.452 60.14,8.287 60.279,8.425 U3_C4.4@60.714,8.425
NetR12_C5_2: R12_C5.2 U3_C5.4 | length 5.1
  Bottom Layer w0.203: R12_C5.2@58.3,54.39 58.3,53.335 60.735,50.9 U3_C5.4@60.735,50.458 ; U3_C5.4@61.351,50.579 U3_C5.4@61.455,50.475
NetR12_C6_2: R12_C6.2 U3_C6.4 | length 5.1
  Bottom Layer w0.203: R12_C6.2@58.3,38.89 58.3,37.835 60.735,35.4 U3_C6.4@60.735,34.958 ; U3_C6.4@61.351,35.079 U3_C6.4@61.455,34.975
NetR12_C7_2: R12_C7.2 U3_C7.4 | length 5.1
  Bottom Layer w0.203: R12_C7.2@58.3,24.39 58.3,23.335 60.735,20.9 U3_C7.4@60.735,20.458 ; U3_C7.4@61.351,20.579 U3_C7.4@61.455,20.475
NetR12_C8_2: R12_C8.2 U3_C8.4 | length 5.1
  Bottom Layer w0.203: R12_C8.2@58.278,10.615 58.278,9.56 60.713,7.126 U3_C8.4@60.713,6.684 ; U3_C8.4@61.329,6.805 U3_C8.4@61.433,6.701
NetTP9_1: TP9.1 U1.32 | length 4.1
  Top Layer w0.203: v1(36.863,34.568) 36.925,34.507 36.925,33.428 U1.32@36.973,33.38
  Bottom Layer w0.203: v1(36.863,34.568) TP9.1@36.863,36.477 37.2,36.814 TP9.1@37.2,37.3
NetTP10_1: TP10.1 U1.31 | length 3.9
  Top Layer w0.203: v1(36.106,34.542) 36.106,34.435 36.425,34.116 36.425,33.428 U1.31@36.473,33.38
  Bottom Layer w0.203: TP10.1@34.296,36.373 36.106,34.563 v1(36.106,34.542)
NetTP11_1: TP11.1 U1.26 | length 6
  Top Layer w0.203: U1.26@33.973,33.38 v1(33.973,34.5)
  Bottom Layer w0.203: v1(33.973,34.5) 34.037,34.437 34.037,29.763 TP11.1@34.1,29.7
NetTP12_1: TP12.1 U1.25 | length 4.8
  Top Layer w0.203: v1(32.7,33.4) 33.453,33.4 U1.25@33.473,33.38
  Bottom Layer w0.203: TP12.1@31.5,29.9 31.8,30.2 31.8,31.3 32.7,32.2 v1(32.7,33.4)
OUT+_C1: J1_C1.1 R11_C1.1 U4_C1.4 | length 15.6
  Top Layer w0.203: R11_C1.1@65.036,47.584 65.201,47.584 65.734,47.051 65.734,46.969 65.853,46.85 68.724,46.85 69.13,47.257 69.252,47.257 69.385,47.389 69.93,47.389 70.185,47.643 70.185,48.226 75.892,53.933 75.892,54.892 J1_C1.1@76,55
OUT+_C2: J1_C2.1 R11_C2.1 U4_C2.4 | length 15.8
  Top Layer w0.203: R11_C2.1@65.036,32.084 65.201,32.084 65.734,31.551 65.734,31.469 65.853,31.35 68.724,31.35 69.13,31.757 69.252,31.757 69.385,31.889 69.385,32.011 76,38.626 J1_C2.1@76,40
OUT+_C3: J1_C3.1 R11_C3.1 U4_C3.4 | length 15.2
  Top Layer w0.203: R11_C3.1@65.036,17.584 65.201,17.584 65.734,17.051 65.734,16.969 65.853,16.85 68.724,16.85 69.13,17.257 69.252,17.257 U4_C3.4@69.385,17.389 ; U4_C3.4@69.755,17.45 70.065,17.45 70.258,17.643 70.258,17.658 76,23.4 J1_C3.1@76,25
OUT+_C4: J1_C4.1 R11_C4.1 U4_C4.4 | length 14.4
  Top Layer w0.203: R11_C4.1@65.014,3.81 65.179,3.81 65.712,3.276 65.712,3.195 65.831,3.076 68.702,3.076 69.108,3.482 69.23,3.482 69.363,3.614 69.363,3.737 J1_C4.1@75.978,10.352
OUT+_C5: J1_C5.1 R11_C5.1 U4_C5.4 | length 16.8
  Bottom Layer w0.203: R11_C5.1@65.134,56.341 65.593,56.8 69.306,56.8 69.884,56.222 69.884,56.1 70.127,55.857 70.716,55.857 73.5,53.074 73.5,50.625 75.761,48.364 75.761,47.739 J1_C5.1@76,47.5
OUT+_C6: J1_C6.1 R11_C6.1 U4_C6.4 | length 16.9
  Bottom Layer w0.203: R11_C6.1@65.134,40.841 65.593,41.3 69.306,41.3 69.884,40.722 69.884,40.6 70.078,40.407 U4_C6.4@70.388,40.407 ; U4_C6.4@70.418,40.437 70.448,40.407 71.793,40.407 74.4,37.8 74.4,34.4 76,32.8 J1_C6.1@76,32.5
OUT+_C7: J1_C7.1 R11_C7.1 U4_C7.4 | length 18.5
  Bottom Layer w0.203: R11_C7.1@65.134,26.341 65.593,26.8 69.306,26.8 69.884,26.222 69.884,26.1 70.078,25.907 72.193,25.907 74.4,23.7 74.4,18.9 75.9,17.4 76.459,16.841
OUT+_C8: J1_C8.1 R11_C8.1 U4_C8.4 | length 18.5
  Bottom Layer w0.203: R11_C8.1@65.112,12.567 65.571,13.026 69.284,13.026 69.862,12.448 69.862,12.326 70.056,12.132 U4_C8.4@70.366,12.132 ; U4_C8.4@70.232,12.326 70.426,12.132 70.676,12.132 74.7,8.108 74.7,3.9 J1_C8.1@76.251,2.349
OUT-_C1: J1_C1.2 U3_C1.8 | length 12.4
  Top Layer w0.203: U3_C1.8@65.036,54.149 68.386,57.5 J1_C1.2@76,57.5
OUT-_C2: J1_C2.2 U3_C2.8 | length 12.6
  Top Layer w0.203: U3_C2.8@65.035,38.749 65.035,39.335 68,42.3 J1_C2.2@75.8,42.3
OUT-_C3: J1_C3.2 U3_C3.8 | length 12.4
  Top Layer w0.203: U3_C3.8@65.036,24.149 68.386,27.5 J1_C3.2@76.014,27.5
OUT-_C4: J1_C4.2 U3_C4.8 | length 12.2
  Top Layer w0.203: U3_C4.8@65.013,10.475 65.079,10.541 65.079,10.901 66.678,12.5 J1_C4.2@76.148,12.5
OUT-_C5: J1_C5.2 U3_C5.8 | length 11.7
  Top Layer w0.203: v1(71.3,48.4) 73.694,48.4 75.096,49.802 75.802,49.802 J1_C5.2@76,50
  Bottom Layer w0.203: U3_C5.8@65.035,48.508 65.15,48.393 71.293,48.393 v1(71.3,48.4)
OUT-_C6: J1_C6.2 U3_C6.8 | length 11.9
  Top Layer w0.203: v1(71.9,32.9) 73.9,32.9 J1_C6.2@76,35
  Bottom Layer w0.203: U3_C6.8@65.035,33.008 65.15,32.893 68.13,32.893 68.167,32.93 71.87,32.93 v1(71.9,32.9)
OUT-_C7: J1_C7.2 U3_C7.8 | length 11.8
  Top Layer w0.203: v1(71.8,18.2) 74.2,18.2 J1_C7.2@76,20
  Bottom Layer w0.203: U3_C7.8@65.035,18.508 65.15,18.393 67.576,18.393 67.769,18.2 v1(71.8,18.2)
OUT-_C8: J1_C8.2 U3_C8.8 | length 11.9
  Top Layer w0.203: v1(71.2,4.6) 71.267,4.6 71.414,4.747 75.747,4.747 J1_C8.2@76,5 J1_C8.2@75.496,5.504
  Bottom Layer w0.203: U3_C8.8@65.013,4.734 65.128,4.619 71.181,4.619 v1(71.2,4.6)
SCLK: J2.3 U1.6 | length 16.9
  Top Layer w0.203: U1.6@36.473,41.88 36.473,49.773 39.7,53 J2.3@39.7,57.396
SDAT: J2.2 U1.5 | length 17.6
  Top Layer w0.203: U1.5@36.973,41.928 36.973,47.873 42.4,53.3 J2.2@42.4,57.32
SK: U1.15 U2.2 | length 20.8
  Top Layer w0.203: v1(26.6,44.037) 26.656,43.981 26.656,43.644 30.92,39.38 31.94,39.38 U1.15@31.956,39.397
  Bottom Layer w0.203: U2.2@22.7,54.835 22.718,54.818 24.208,54.818 26.6,52.425 v1(26.6,44.037)
USB_N: R1.2 TP13.1 U1.19 | length 10.2
  Top Layer w0.2: R1.2@23.8,35.7 23.825,35.7 24.2,36.075 24.2,36.19 24.317,36.307 25.034,36.307 26.313,37.587 27.148,37.587 27.346,37.389 27.636,37.389 28.344,36.682 TP13.1@28.344,36.402 ; TP13.1@28.344,36.38 TP13.1@28.344,36.402 ; U1.19@31.973,37.38 31.923,37.43 31.249,37.43 31.2,37.479 29.78,37.479 29.69,37.389 29.331,37.389 TP13.1@28.344,36.402
USB_P: R2.2 R8.2 TP14.1 U1.18 | length 10.2
  Top Layer w0.2: R2.2@23.8,37.216 23.825,37.216 24.2,36.841 24.2,36.726 24.317,36.609 24.909,36.609 26.188,37.888 27.273,37.888 27.471,37.691 27.636,37.691 28.3,38.354 TP14.1@28.3,38.7 28.322,38.7 29.331,37.691 29.565,37.691 29.655,37.781 31.2,37.781 31.249,37.83 31.923,37.83 U1.18@31.973,37.88
USB_RAW_N: C4.2 D5.4 J1.2 R1.1 | length 16.5
  Top Layer w0.203: J1.2@15,39.37 14.152,40.218 14.152,40.681 14.271,40.8 16.081,40.8 16.838,40.043 16.838,37.346 17.736,36.448 18.031,36.448 18.15,36.329 ; D5.4@18.15,35.35 18.15,36.329 ; R1.1@22.2,35.425 R1.1@22.3,35.325 ; R1.1@22.2,35.7 22.175,35.7 21.802,36.073 21.802,36.186 21.683,36.306 20.073,36.306 19.931,36.448 18.269,36.448 18.15,36.329 ; C4.2@22.3,33.7 R1.1@22.3,35.325 ; R1.1@22.3,35.425 R1.1@22.3,35.325
USB_RAW_P: C3.2 D5.3 J1.3 R2.1 | length 17
  Top Layer w0.203: J1.3@13,39.37 13.848,40.218 13.848,40.807 14.145,41.105 16.207,41.105 17.143,40.169 17.143,37.472 17.863,36.752 18.031,36.752 18.15,36.871 ; D5.3@18.15,37.85 18.15,36.871 ; C3.2@22.2,39.1 R2.1@22.2,37.216 22.175,37.216 21.802,36.842 21.802,36.729 21.683,36.61 20.199,36.61 20.057,36.752 18.269,36.752 18.15,36.871
VOLDN: S3.1 S3.2 U1.44 | length 42.5
  Top Layer w0.203: S3.2@13.561,49.128 S3.1@13.561,57.077 ; S3.2@14.161,49.128 14.161,49.001 16.401,46.761 27.49,46.761 29.406,44.844 29.406,44.106 v1(29.4,44.1) ; U1.44@40.473,38.38 41.511,38.38 42.004,38.873 v1@42.061,38.873
  Bottom Layer w0.203: v1(29.4,44.1) 29.457,44.043 29.457,43.792 34.376,38.873 v1(42,38.873)
VOLUP: S1.1 S1.2 U1.43 | length 50.8
  Top Layer w0.203: S1.2@6.061,49.128 S1.1@6.061,57.077 ; S1.2@6.661,49.128 6.661,48.139 8.445,46.355 27.321,46.355 28.5,45.176 v1(28.5,44.1) ; U1.43@40.473,37.88 41.841,37.88 v1@42.061,38.1
  Bottom Layer w0.203: v1(28.5,44.1) 34.5,38.1 v1@42.061,38.1
  other v1: 42,38.1
XI: C7.2 U1.2 X1.1 | length 12.3
  Top Layer w0.203: U1.2@38.473,41.88 38.473,43.137 38.37,43.239 38.37,43.761 38.739,44.13 43.453,44.13 43.65,44.327 43.65,45.629 43.531,45.748 43.464,45.748 43.345,45.868 43.345,45.956 42.952,46.35 X1.1@42.85,46.35 42.9,46.4 42.9,48.7
XO: C8.2 U1.3 X1.3 | length 5.6
  Top Layer w0.203: U1.3@37.973,41.88 37.973,43.062 37.964,43.071 37.964,44.514 38.5,45.05 ; C8.2@39,45.3 40.9,45.3 X1.3@41.15,45.05
pads on no net: D5.1 U1.13 U1.23 U1.24 U1.29 U1.45 U1.48 U2.7 U6.7 U6.8 U6.11 U6.14 U6.39 U7.4

## Polygon pours and split planes (outlines as drawn)
DGND on GND "DGND" (solid, pour order 16): 0,0 0,60 80,60 80,0
AGND on GND "AGND" (solid, pour order 11): 47.5,32.67 47.5,60 80,60 80,0 0,0 0,32 0,0 0,32.67
AVDD5V on Power "AVDD5V" (solid, pour order 13): 80,0 62.79,0 62.79,60 80,60
AMP on Power "AMP" (solid, pour order 12): 0,0 67,0 67,60 0,60

## Silkscreen, mask and mechanical layers (free items; w line width, h text height)
Top Overlay:
  region: 25.64,10.43 24.45,10.43 24.45,20.92 34.912,20.92 34.912,19.37 26,19.37 26,10.43 25.668,10.43
  region: 29.571,16.381 28.962,16.381 28.962,14.942 34.94,14.942 34.94,13.419 34.912,13.419 34.912,13.392 28.962,13.392 28.962,11.98 34.94,11.98 34.94,10.43 27.412,10.43 27.412,17.931 34.912,17.931 34.912,17.903 34.94,17.903 34.94,16.381 29.598,16.381
  text "Marissa Liu / Rev 1 / 2/19/2025" at 24.3,2.232 h1
Mechanical Outline:
  the board outline again, w0.254

## Text inside footprints (layer, text, board x,y; h text height)
J1: Mechanical 5 "PCB EDGE" at 0.315,40.87 h0.8 r270